# Altium PCB Nguyen Quang Minh.PcbDoc
Units mil, origin at the board's own origin, x right, y up, seen from the top; angles counter-clockwise.
Board outline 5455.75 x 2796.06 mil, 2 copper layers (Top Layer, Bottom Layer); 18 components, 15 nets, 50 pads, 1 vias.
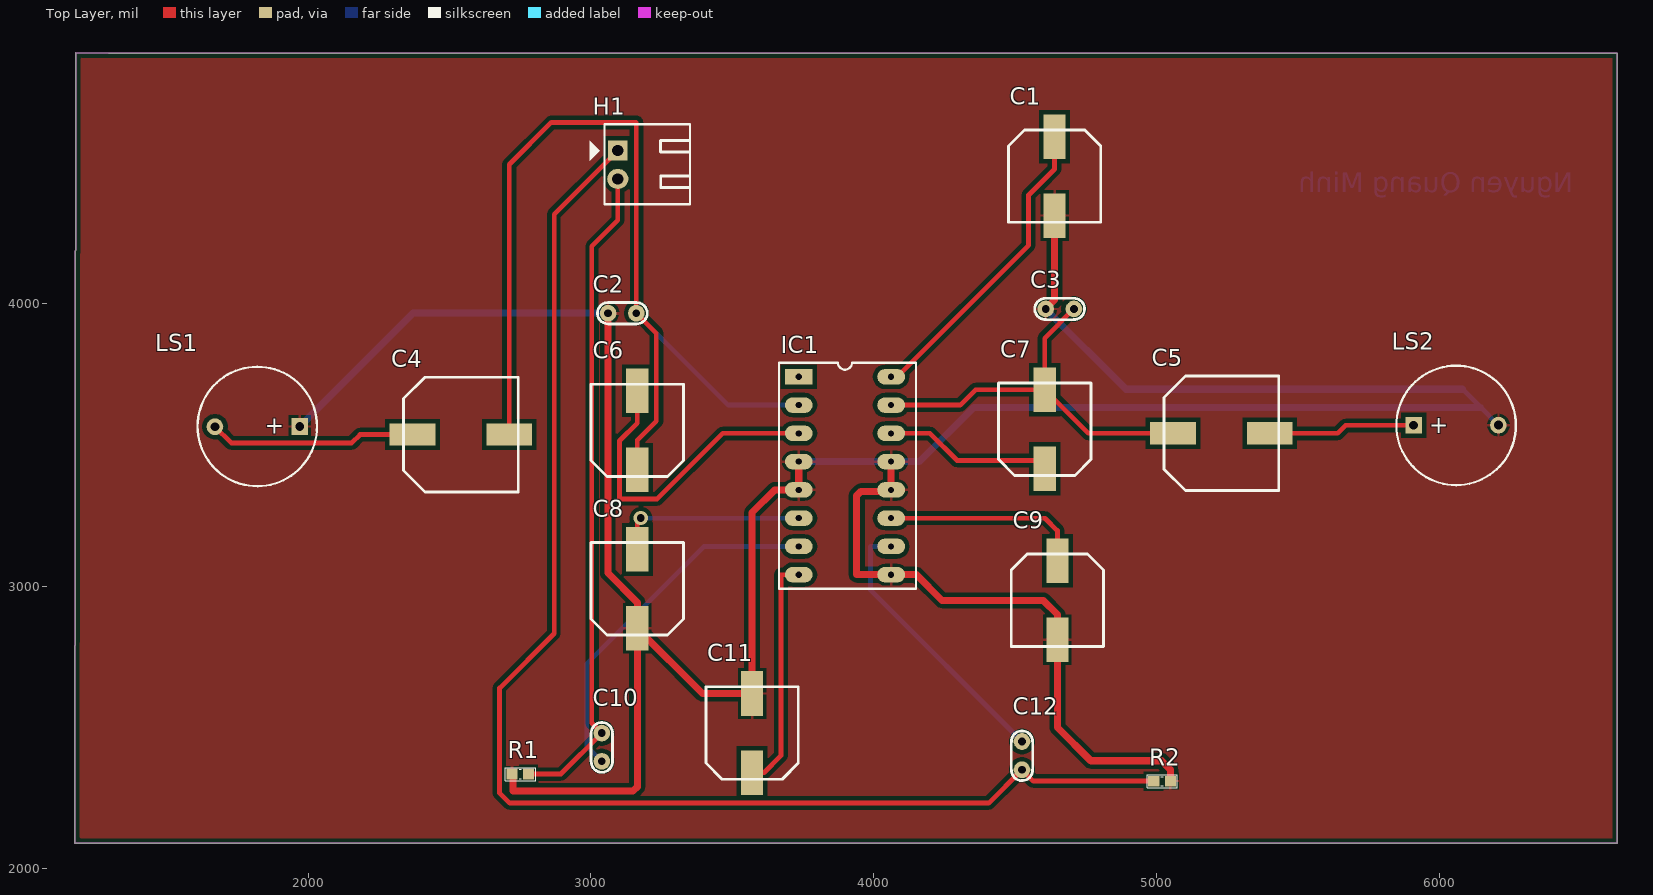
[diagram p0: Top Layer view]
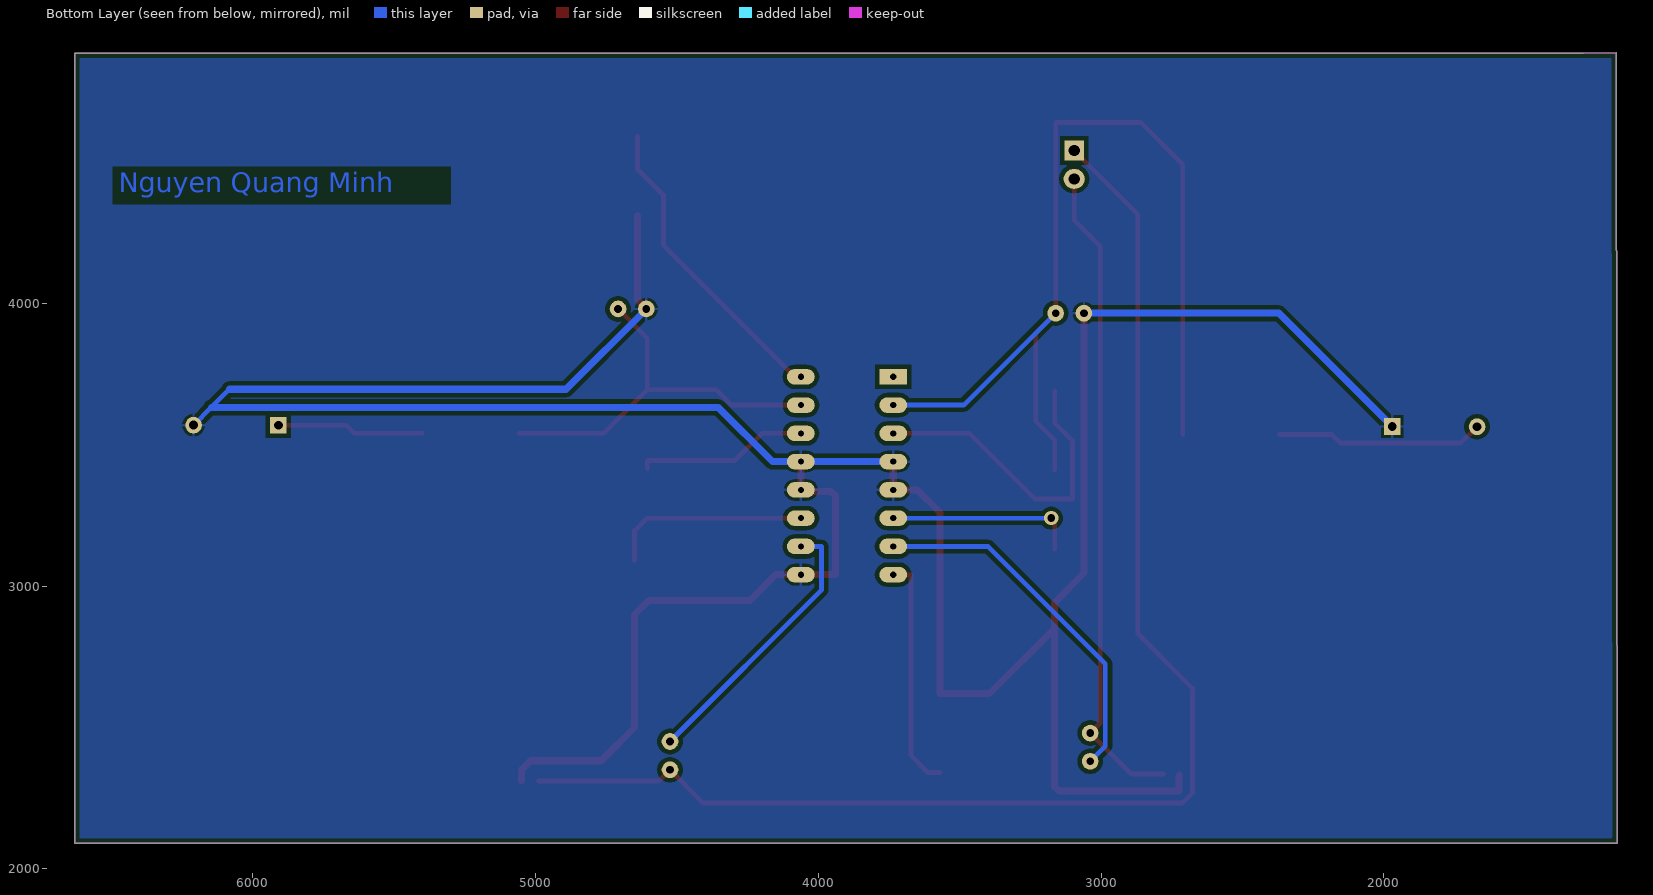
[diagram p1: Bottom Layer view, seen from below]
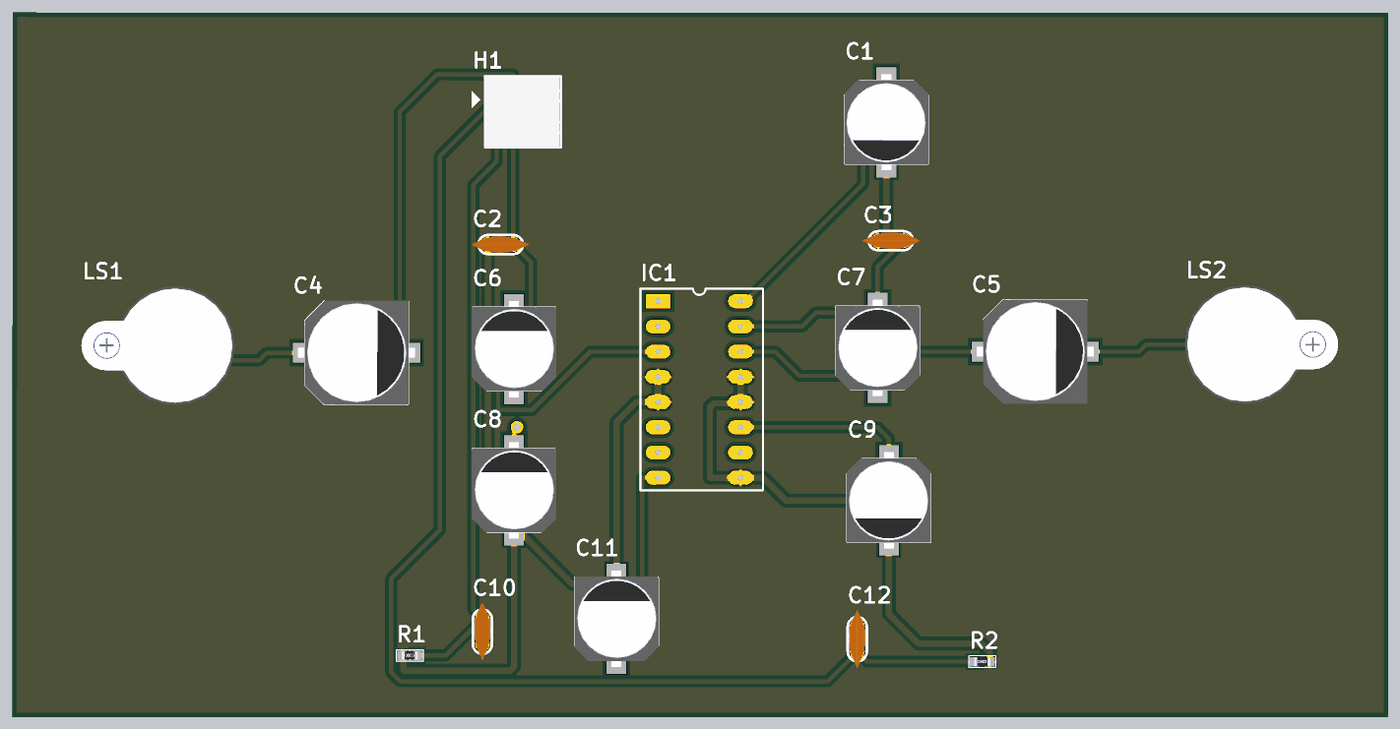
[diagram p2: 3D render of the assembled board from above, using the file's embedded part models]

## Layer stack, top to bottom
Top Solder: solder mask 0.4, Solder Resist, Dk 3.5
Top Layer: signal copper 1.4
Dielectric 1: dielectric 12.6, FR-4, Dk 4.8
Bottom Layer: signal copper 1.4
Bottom Solder: solder mask 0.4, Solder Resist, Dk 3.5

## Board outline
1175,2090 1174.25,2090.75 1177.43,4886.06 1295,4885 6630,4885 6630,2090

## Design rules (kind name [scope] priority, off if disabled: settings)
Clearance [All] p1: gap=15 ignorepadtopadclearanceinfootprint=FALSE
PolygonConnect [All] p1: connectstyle=Relief reliefconductorwidth=10 reliefentries=4 polygonreliefangle="90 Angle" airgapwidth=10
RoomDefinition "Nguyen Quang Minh" [InComponentClass('Nguyen Quang Minh')] p1: confinementstyle=ConfineIn formatcopy=TRUE lockcomponents=FALSE outline 7010,665 13560,665 13560,1980 7010,1980
RoutingVias [All] p1: holewidth=28 width=50 viastyle="Through Hole" minholewidth=28 minwidth=50 maxholewidth=28 maxwidth=50
SolderMaskExpansion [All] p1: expansion=4 istentingtop=FALSE
Width [All] p1: maxlimit=25 minlimit=17 preferedwidth=17
30 further rules are at their usual default settings.

## Components (designator, comment, footprint, x,y, rotation, side; value= is the part's Value field where it differs from the comment)
C1 "100uF" "tu nhom 8 (f)" 4640,4450 r270 top
C2 "0.15uF" "tu gom" 3110.5,3965 r180 top
C3 "0.15uF" "tu gom" 4658.39,3980 r0 top
C4 "470uF" "tu nhom 10 (G)" 2540,3535.49 r0 top
C5 "470uF" "tu nhom 10 (G)" 5230,3540 r0 top
C6 "100uF" "tu nhom 8 (f)" 3163.89,3550.24 r90 top
C7 "100uF" "tu nhom 8 (f)" 4605,3554.75 r90 top
C8 "100uF" "tu nhom 8 (f)" 3163.89,2990 r90 top
C9 "100uF" "tu nhom 8 (f)" 4650,2949.76 r270 top
C10 "0.22uF" "tu gom" 3038.5,2429.87 r90 top
C11 "100uF" "tu nhom 8 (f)" 3570,2480 r90 top
C12 "0.22uF" "tu gom" 4524.61,2400 r90 top
H1 "Header 2P 2.54 Duc Cong" "Header 2P DC 2.54" 3095,4540 r0 top
IC1 "CD2025CP" CD2025CP 3735,3740 r0 top
LS1 "Coi Chip Speaker" "Coi Chip Speacker" 1970,3563.96 r180 top
LS2 "Coi Chip Speaker" "Coi Chip Speacker" 5910,3568.46 r0 top
R1 "1k" "tro smd 0603" 2750,2335 r0 top
R2 "1k" "tro smd 0603" 5020,2310.13 r0 top

## Footprints (in the part's own frame and the unit in brackets; to place one, negate y for a bottom-side part, rotate by r counter-clockwise, add the part's x,y. Pads: shape width x height; smd on the part's side, far side on the other; paste and mask are expansions set on the pad)
CD2025CP [mm]
  rect 2.5x1.4 hole 0.55: 1(0,0)
  oval 2.5x1.4 hole 0.55: 2(0,-2.54) 3(0,-5.08) 4(0,-7.62) 5(0,-10.16) 6(0,-12.7) 7(0,-15.24) 8(0,-17.78) 9(8.3,-17.78) 10(8.3,-15.24) 11(8.3,-12.7) 12(8.3,-10.16) 13(8.3,-7.62) 14(8.3,-5.08) 15(8.3,-2.54) 16(8.3,0)
  silkscreen extent -1.78,-19.05 10.54,1.27
"Coi Chip Speacker" [mm]
  rect 1.5x1.5 hole 0.8: 1(0,0)
  round 1.5 hole 0.8: 2(7.62,0.013)
  silkscreen extent -1.55,-5.38 9.18,5.36, body extent -2.22,-6 13.24,6, height 4.5
"Header 2P DC 2.54" [mil]
  rect 70x70 hole 39.37 unplated: 1(0,0)
  oval 75x70 hole 39.37 unplated: 2(0,-100)
  silkscreen extent -100,-190 255,93, body extent -50,-190 250,90, height 237
"tro smd 0603" [mm] "Chip Capacitor, 2-Leads, Body 1,60x0,80mm, IPC Medium Density"
  rect 1x0.95 smd mask+0.076: 1(-0.75,0) 2(0.75,0)
  silkscreen extent -1.35,-0.58 1.37,0.58, body extent -0.82,-0.42 0.82,0.43, height 0.44
"tu gom" [mm] "Tu gom mini"
  round 1.5 hole 0.7: 1(-1.27,0) 2(1.27,0)
  silkscreen extent -2.25,-0.97 2.22,0.97, body extent -2.92,-0.85 2.92,0.85, height 6.12
"tu nhom 8 (f)" [mm]
  rect 4x2 smd: 1(-3.55,0) 2(3.55,0)
  silkscreen extent -4.15,-4.15 4.15,4.15, body extent -4.85,-4.25 4.85,4.25, height 10.5
"tu nhom 10 (G)" [mm]
  rect 4.1x2 smd: 1(-4.35,0) 2(4.35,0)
  silkscreen extent -5.15,-5.15 5.15,5.15, body extent -5.9,-5.25 5.9,5.25, height 10.5

## Part data
C1 C6 C7 C8 C9 C11: library part "Tu Nhom 100uF 50V", "Dán", Chung_Loai=Dán, Don_Vi=Con, Ma_Hang=MH002223, So_Chan=2, Ten_Linh_Kien="Tụ Nhôm 100uF 50V 8x10.2MM"
C2 C3 C10 C12: library part "Tu gom 15pF 50V", "Cắm", Chung_Loai=Cắm, Don_Vi=Con, Ma_Hang=MH004767, So_Chan=2, Ten_Linh_Kien="Tụ gốm 15P 50V"
C4 C5: library part "Tu Nhom 470uF 35V", "Dán", Chung_Loai=Dán, Don_Vi=Con, Ma_Hang=MH004418, So_Chan=2, Ten_Linh_Kien="Tụ Nhôm 470uF 35V 10x10.5MM"
H1: "Cắm", Chung_Loai=Cắm, Don_Vi=Con, Ma_Hang=MH002852, Ten_Linh_Kien="Header 2P XH2.54-2P Đực Cong"
LS1 LS2: "Còi chip"
R1 R2: library part "Tro 0603 1% 1k", "Dán", Chung_Loai=Dán, Don_Vi=Con, Ma_Hang=MH006334, So_Chan=2, Ten_Linh_Kien="Trở 0603 1% 1k"

## Via types
v1: diameter 50, hole 28, Top Layer to Bottom Layer, 1 vias

## Nets (pads, with @x,y where several pads share a name; then routed paths per layer and width w, separated by ;. In a path a pad name is that pad's centre, name@x,y a point inside that pad or via, vN(x,y) a via of type N, cw(c..) or ccw(c..) an arc to the next point about the centre after c; other vN are vias at no path point)
GND: C1.2 C2.2 C3.1 C8.1 C9.2 C11.2 IC1.4 IC1.5 IC1.9 IC1.12 IC1.13 LS1.1 LS2.2 R1.1 R2.2 | length 11707.5
  Top Layer w17: R1.1 R1.1@2725,2330.47
  Top Layer w25: R1.1@2725,2330.47 2725,2275 3149.24,2275 3163.89,2289.64 C8.1 ; C2.2 3060.5,3045.39 3163.89,2942 C8.1 ; IC1.4 IC1.5 3650,3340 3570,3260 C11.2 3394.36,2619.76 C8.1 ; IC1.13 IC1.12 4056.77,3335 3954.64,3335 3940,3320.36 3940,3040 IC1.9 4151,3040 4242,2949 4600,2949 4650,2899 C9.2 4650,2500 4768,2382 5017.53,2382 5049.53,2350 R2.2 ; C3.1 4640,4011.61 C1.2
  Bottom Layer w17: 6082.96,3696 6146.96,3632 LS2.2
  Bottom Layer w25: LS1.1 2371.04,3965 C2.2 ; IC1.4 IC1.13 4162,3440 4354,3632 6146.96,3632 ; C3.1 4892.39,3696 6082.96,3696
NetC2_1: C2.1 C4.2 C6.1 IC1.2 | length 3462.1
  Top Layer w17: C4.2 2711,3535.49 2711,4491 2860,4640 3160.5,4639.5 C2.1 3231,3894.5 3231,3583.11 3163.89,3516 C6.1
  Bottom Layer w17: C2.1 3485.5,3640 IC1.2
NetC3_2: C3.2 C5.1 C7.2 IC1.15 | length 1411.9
  Top Layer w17: IC1.15 4306,3640 4360.51,3694.51 C7.2 ; C3.2 4605,3876.61 C7.2 ; C5.1 4759.51,3540 C7.2
NetC4_1: C4.1 LS1.2 | length 734.8
  Top Layer w17: LS1.2 1727.46,3506 2154,3506 2183.49,3535.49 C4.1
NetC5_2: C5.2 LS2.1 | length 520.5
  Top Layer w17: C5.2 5641,3540 5669.46,3568.46 LS2.1
NetC6_2: C6.2 IC1.3 | length 1138.1
  Top Layer w17: C6.2 3163.89,3575.87 3101.01,3513 3101.01,3308 3234,3308 3466,3540 IC1.3
NetC7_1: C7.1 IC1.14 | length 612
  Top Layer w17: IC1.14 4199,3540 4295,3444 4605,3444 C7.1
NetC8_2: C8.2 IC1.6 | length 674.3
  Top Layer w17: C8.2 3163.89,3227.89 v1(3176,3240)
  Bottom Layer w17: v1(3176,3240) IC1.6
NetC9_1: C9.1 IC1.11 | length 712.9
  Top Layer w17: IC1.11 4606,3240 4650,3196 C9.1
NetC10_1: C10.1 IC1.7 | length 1289.2
  Bottom Layer w17: C10.1 2985,2433.37 2985,2725 3400,3140 IC1.7
NetC11_1: C11.1 IC1.8 | length 830.1
  Top Layer w17: C11.1 3570,2340 3612,2340 3672,2400 3672,3040 IC1.8
NetC12_2: C12.2 IC1.10 | length 984.6
  Bottom Layer w17: IC1.10 3989,3140 3989,2985.61 C12.2
VCC: C1.1 IC1.16 | length 1101.7
  Top Layer w17: IC1.16 4083,3740 4548,4205 4548,4383 4640,4475 C1.1
"Vin 1": C12.1 H1.1 R2.1 | length 4839.2
  Top Layer w17: H1.1 2870,4315 2870,2832 2677,2639 2677,2267.56 2712.56,2232 4406.61,2232 C12.1 4564.48,2310.13 R2.1
"Vin 2": C10.2 H1.2 R1.2 | length 2331.9
  Top Layer w17: R1.2 2893.63,2335 C10.2 3003,2515.37 3003,4202 3095,4294 H1.2
pads on no net: IC1.1

## Polygon pours and split planes (outlines as drawn)
GND on Bottom Layer "GND_L02_P000" (solid, pour order 0): 1175,4885 6630,4885 6630,2090 1175,2090
GND on Top Layer "GND_L01_P001" (solid, pour order 1): 1175,4885 6630,4885 6630,2090 1175,2090

## Keep-outs
Keep-Out Layer:
  lines w5: 1177.43,4886.06 1177.43,4886.06 ; 1177.43,4886.06 1295,4885 6630,4885 6630,2090 1175,2090 1174.25,2090.75 1177.43,4886.06 ; 1177.43,4886.06 1177.43,4886.06

## Other copper
Bottom Layer:
  text "Nguyen Quang Minh" at 6475,4393.33 h70

## Text inside footprints (layer, text, board x,y; h text height)
LS1: Top Overlay "+" at 1914.5,3591.96 h60 r180
LS2: Top Overlay "+" at 5965.5,3540.46 h60